# Altium PCB PCB1.PcbDoc
Units mm, origin at the board's own origin, x right, y up, seen from the top; angles counter-clockwise.
Board outline 152.4 x 101.6 mm, 4 copper layers (Top Layer, Int1 (GND), Int2 (PWR), Bottom Layer), stack 1.569 mm thick; 49 components, 40 nets, 216 pads, 0 vias.
Unrouted connection lines stored in the file: 131.
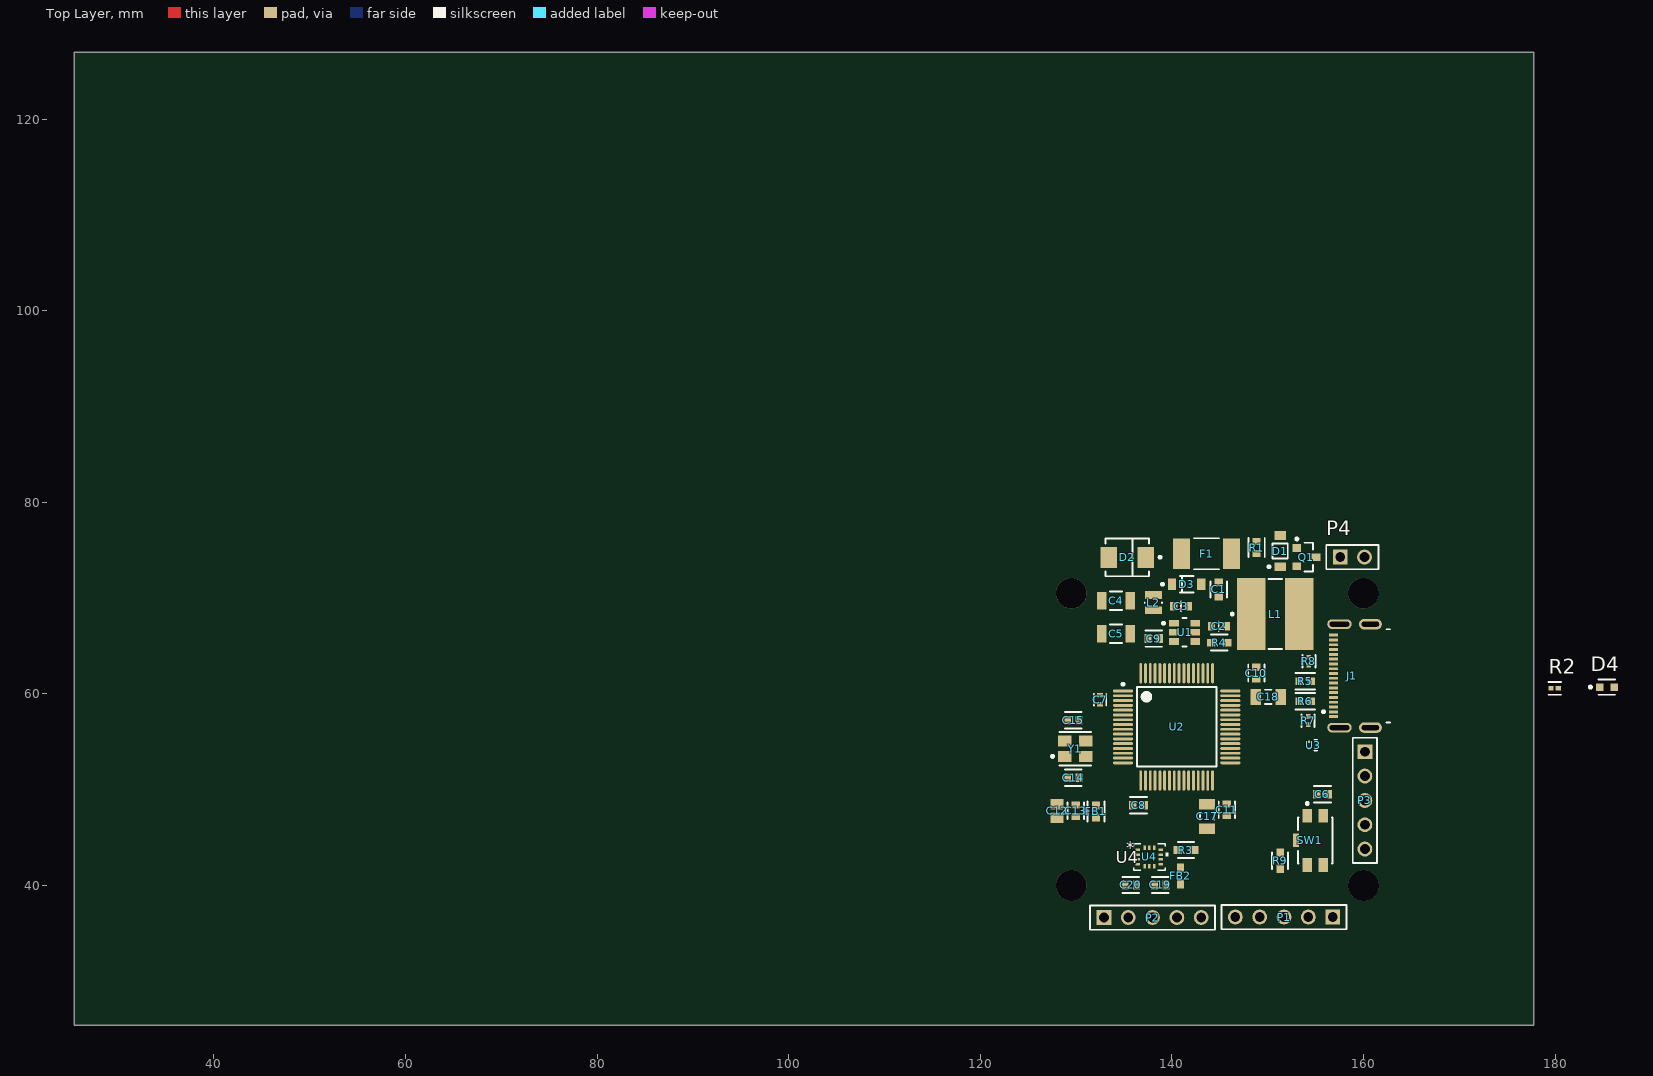
[diagram p0: Top Layer view]
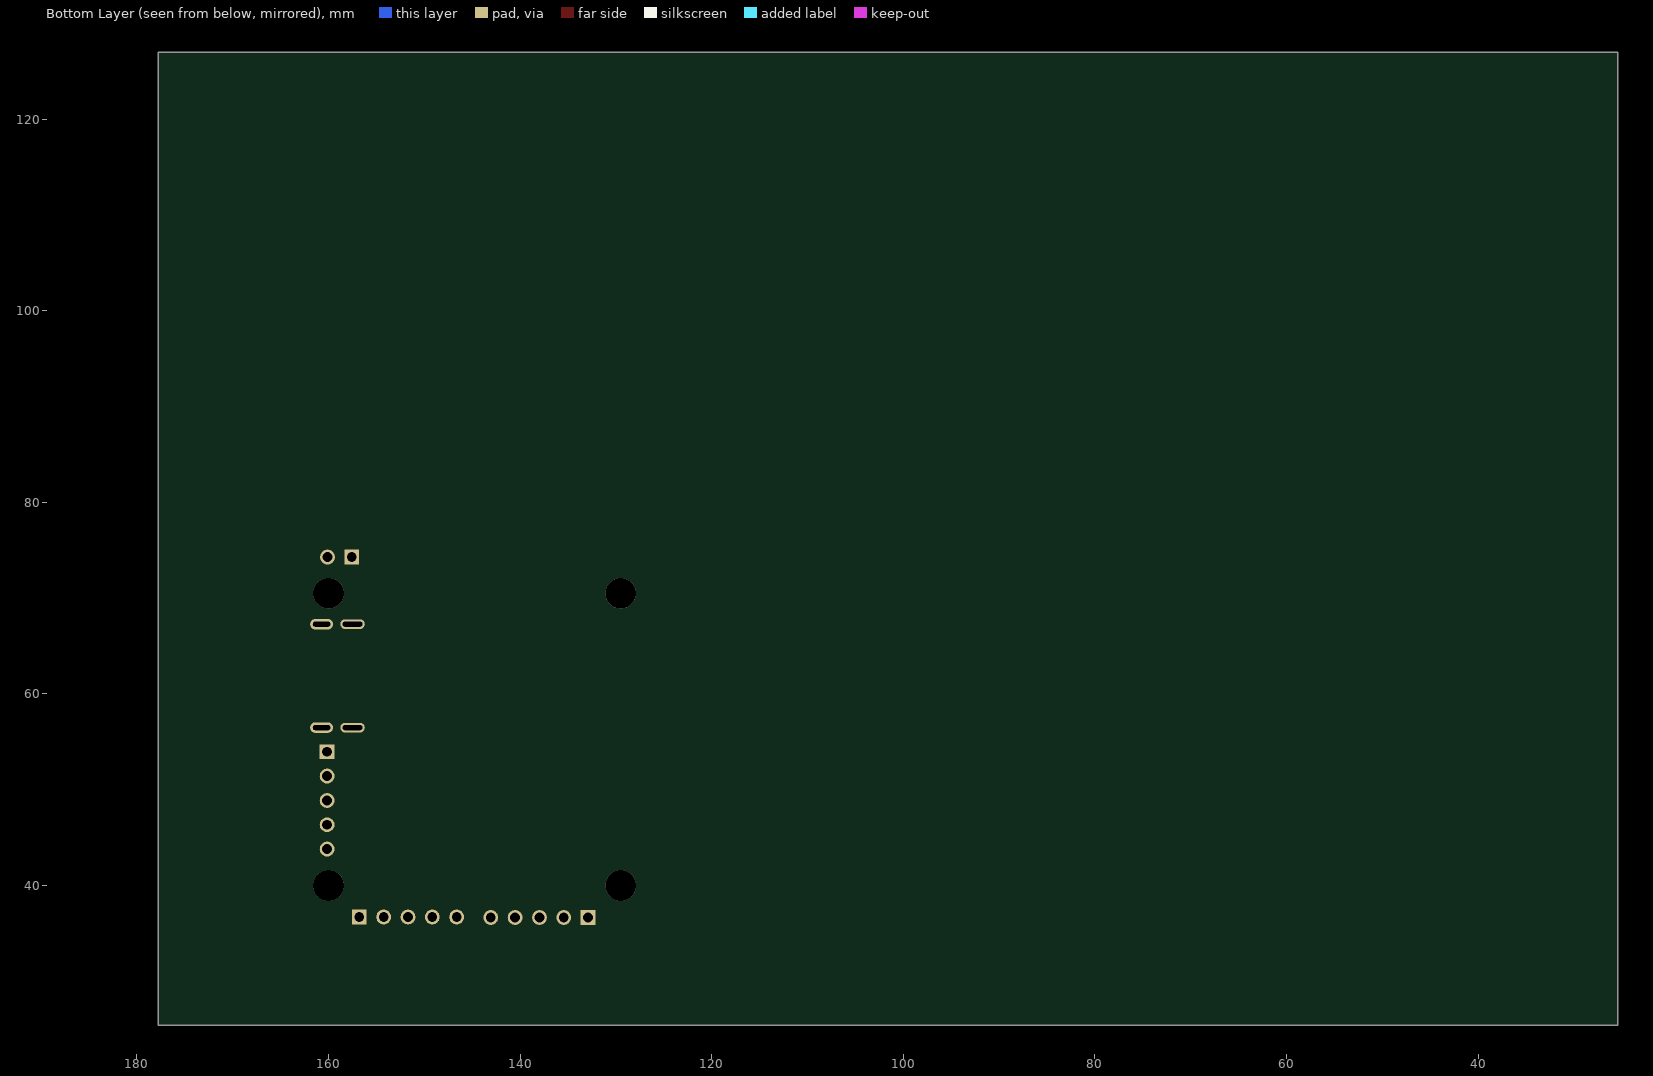
[diagram p1: Bottom Layer view, seen from below]
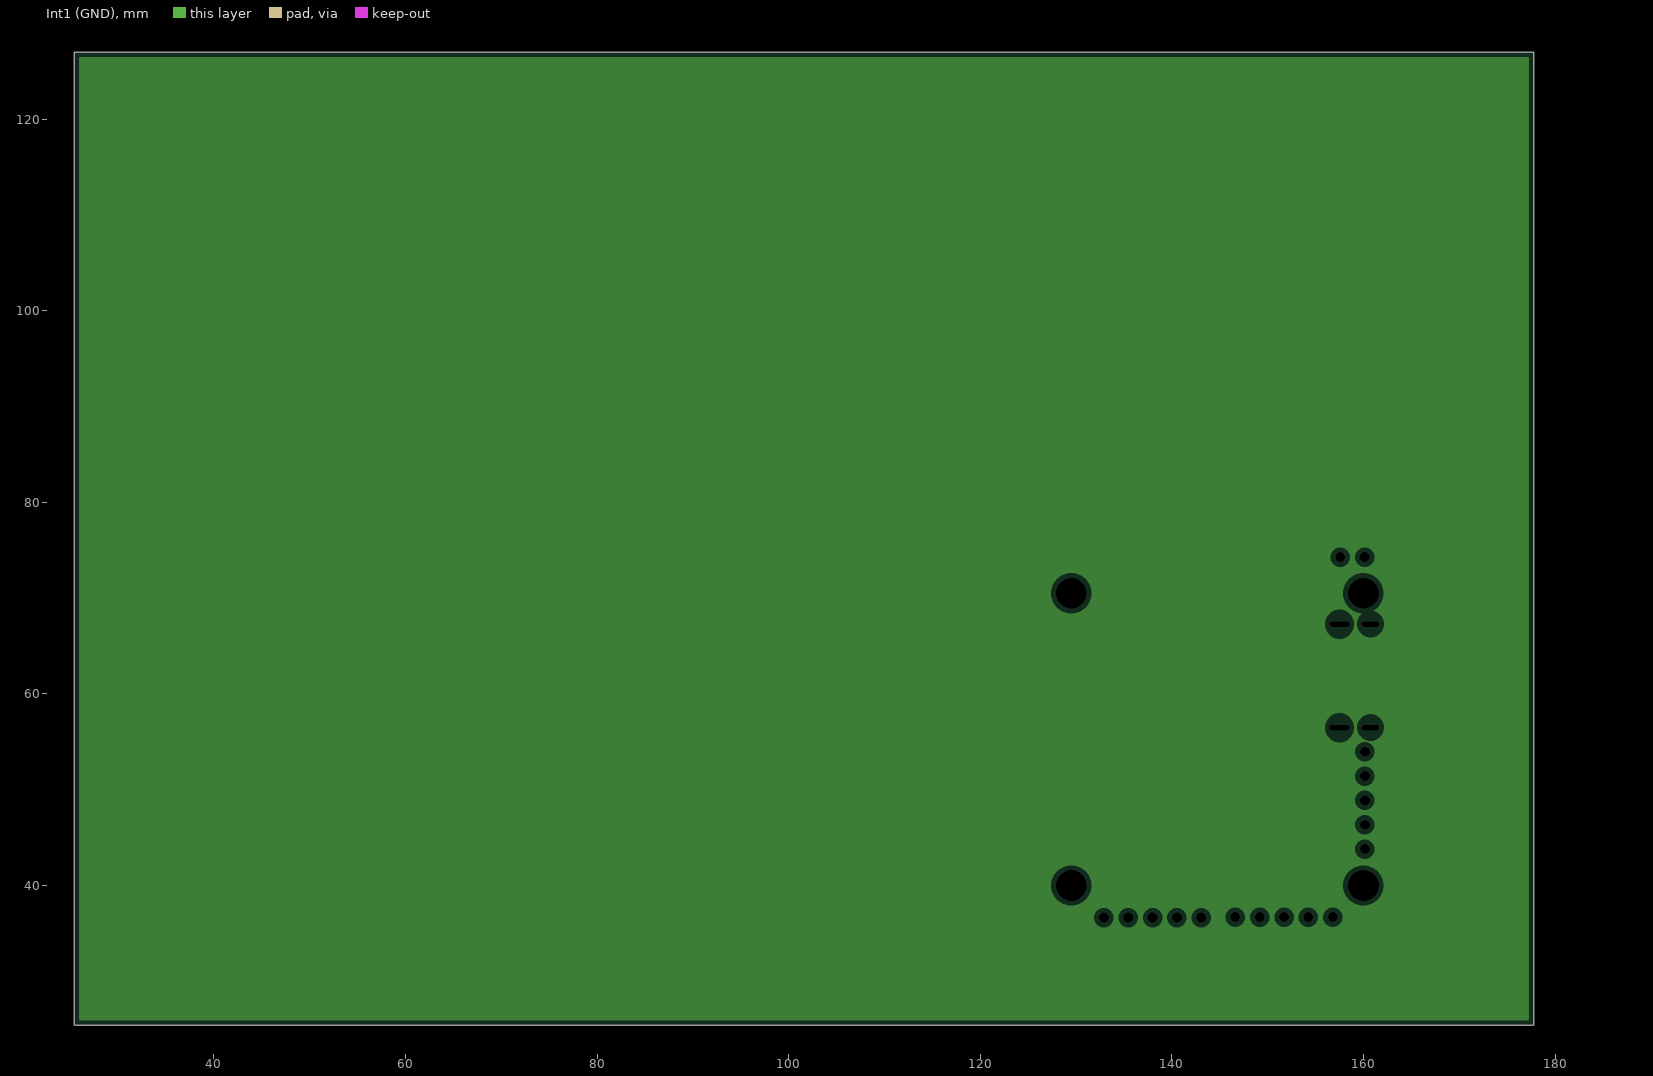
[diagram p2: Int1 (GND), clearances drawn from the general rule]
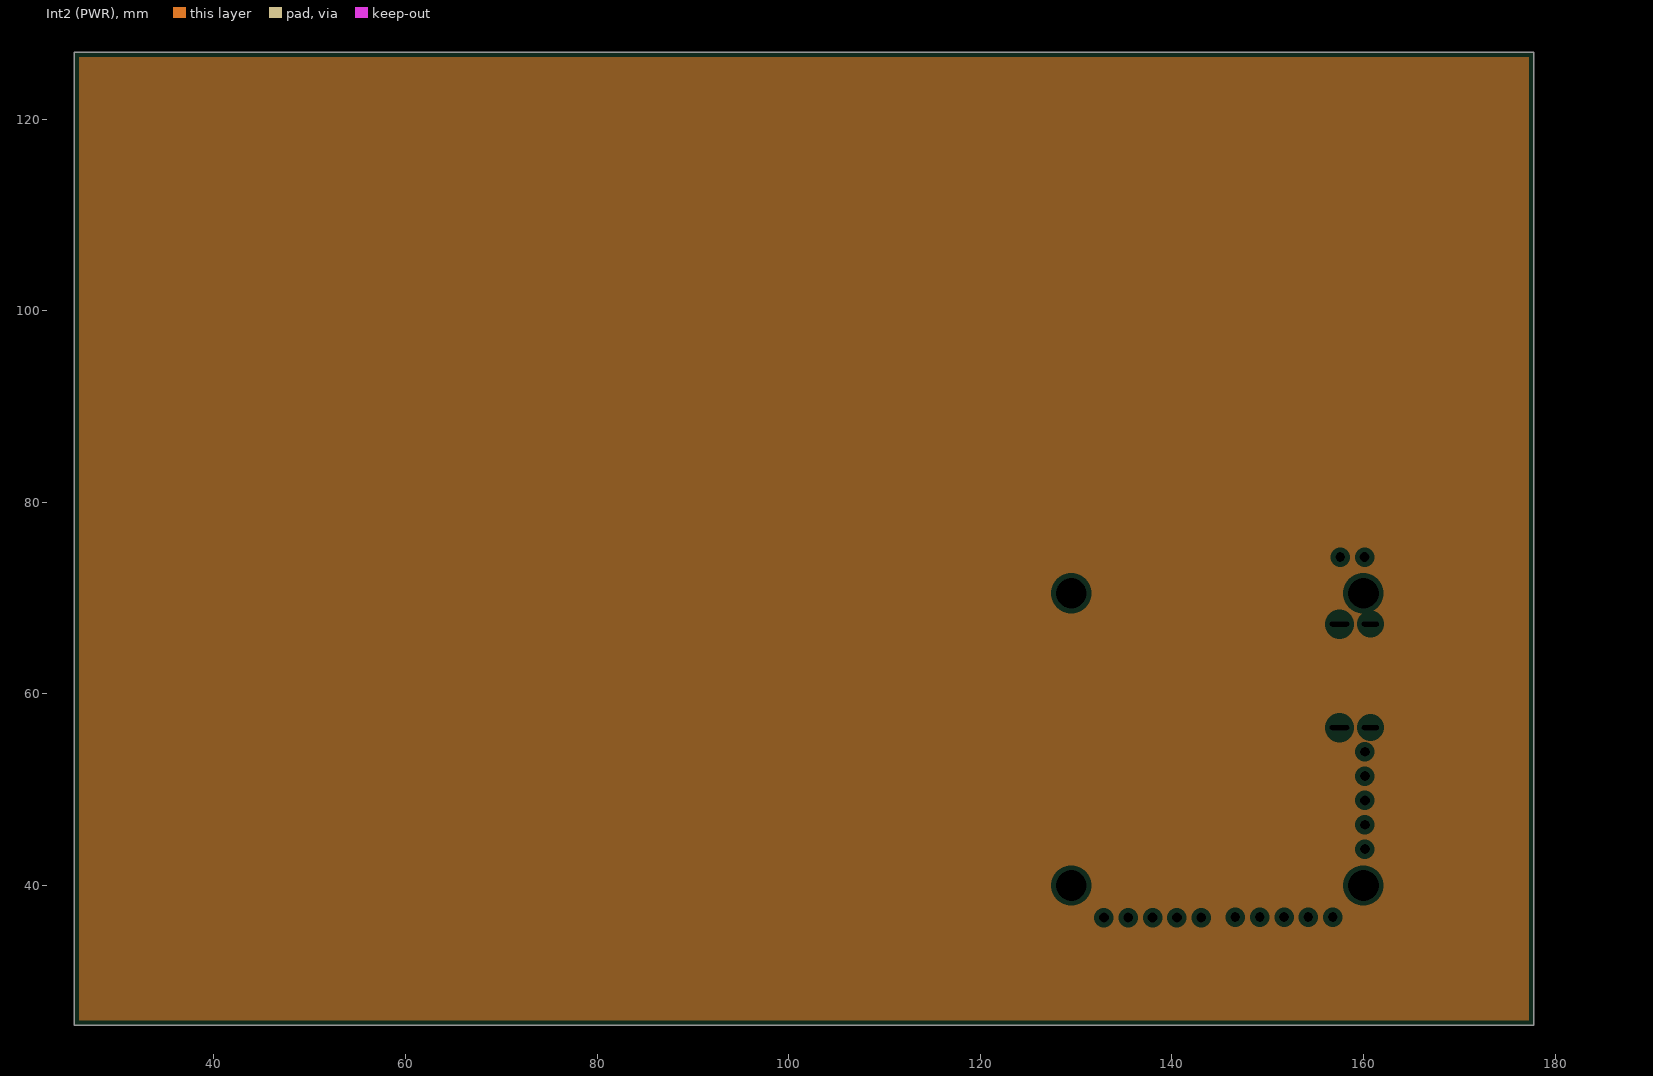
[diagram p3: Int2 (PWR), clearances drawn from the general rule]

## Layer stack, top to bottom
Top Solder: solder mask 0.0254, SM-001, Dk 4
Top Layer: signal copper 0.035
Dielectric 1: prepreg 0.0994, PP-017, Dk 4.1
Int1 (GND): plane copper 0.0175
Dielectric 3: core 1.265, Core-039, Dk 4.6
Int2 (PWR): plane copper 0.0175
Dielectric 5: prepreg 0.0994, PP-017, Dk 4.1
Bottom Layer: signal copper 0.035
Bottom Solder: solder mask 0.0254, SM-001, Dk 4

## Board outline
25.4,25.4 177.8,25.4 177.8,127 25.4,127

## Design rules (kind name [scope] priority, off if disabled: settings)
Clearance [All] p1: gap=0.254 ignorepadtopadclearanceinfootprint=TRUE
PlaneClearance [All] p1: clearance=0.508
PlaneConnect [All] p1: planeconnectstyle=Relief reliefexpansion=0.508 reliefentries=4 reliefconductorwidth=0.254 reliefairgap=0.254
PolygonConnect [All] p1: connectstyle=Relief reliefconductorwidth=0.254 reliefentries=4 polygonreliefangle="90 Angle" airgapwidth=0.254
RoutingVias [All] p1: holewidth=0.711 width=1.27 viastyle="Through Hole" minholewidth=0.711 minwidth=1.27 maxholewidth=0.711 maxwidth=1.27
SolderMaskExpansion [All] p1: expansion=0.102 istentingtop=FALSE
SupplyNets "Schematic Supply Nets_4" [InNet('3V3A')] p1: voltage=0.000
SupplyNets "Schematic Supply Nets_3" [InNet('3V3')] p2: voltage=0.000
SupplyNets "Schematic Supply Nets_2" [InNet('GND')] p3: voltage=0.000
SupplyNets "Schematic Supply Nets_1" [InNet('V_BAT')] p4: voltage=0.000
SupplyNets "Schematic Supply Nets" [InNet('USB_VBUS')] p5: voltage=0.000
Width [All] p1: maxlimit=0.5 minlimit=0.2 preferedwidth=0.254 toplayer_prefwidth=0.2 bottomlayer_minwidth=0.254 bottomlayer_maxwidth=0.254 minimp=50.000000 maximp=50.000000 favimp=50.000000
28 further rules are at their usual default settings.

## Classes and differential pairs
component class Power: C1 C2 C3 C4 C5 D1 D2 D3 D4 F1 L1 L2 P4 Q1 R1 R2 U1
component class MCU: C6 C7 C8 C9 C10 C11 C12 C13 C14 C15 C17 C18 FB1 R3 R4 R9 SW1 U2 Y1
component class Connectors: C19 C20 FB2 J1 P1 P2 P3 R5 R6 R7 R8 U3 U4

## Components (designator, comment, footprint, x,y, rotation, side; value= is the part's Value field where it differs from the comment)
C1 "CC0603MRX7R9BB104" FP-CC0603-DA-MFG 144.9,70.9 r270 top value="100 nF"
C2 "ZRB18AR61A226ME01K" FP-ZRB18A-0_2-MFG 144.9,67.075 r0 top
C3 "ZRB18AR61A226ME01K" FP-ZRB18A-0_2-MFG 140.975,69.15 r180 top
C4 "CC1206KKX5R9BB106" FP-CC1206-FD-MFG 134.175,69.725 r180 top
C5 "CC1206KKX5R9BB106" FP-CC1206-FD-MFG 134.175,66.275 r180 top
C6 "100n" FP-C0603C-CF-MFG 155.725,49.525 r180 top value="0.10 μF"
C7 "10u" FP-GRM155-0_2-MFG 132.5,59.375 r270 top
C8 "100n" FP-C0603C-CF-MFG 136.525,48.375 r180 top value="0.10 μF"
C9 "100n" FP-C0603C-CF-MFG 138.1,65.775 r0 top value="0.10 μF"
C10 "100n" FP-C0603C-CF-MFG 148.825,62.175 r90 top value="0.10 μF"
C11 "100n" FP-C0603C-CF-MFG 145.75,47.9 r270 top value="0.10 μF"
C12 "1u" CAPC2013X145X50LL20T25 128.025,47.775 r270 top
C13 "100n" FP-C0603C-CF-MFG 129.975,47.8 r270 top value="0.10 μF"
C14 "10p" FP-C0603C-CF-MFG 129.701,51.25 r0 top value="10 pF"
C15 "10p" FP-C0603C-CF-MFG 129.701,57.25 r180 top value="10 pF"
C17 "2.2u" CAPC3216X180X50LL20T25 143.675,47.2 r270 top
C18 "2.2u" CAPC3216X180X50LL20T25 150.05,59.675 r0 top
C19 "100n" FP-C0603C-CF-MFG 138.8,40.05 r180 top value="0.10 μF"
C20 "100n" FP-C0603C-CF-MFG 135.7,40.05 r0 top value="0.10 μF"
D1 "SZMMSZ4696T1G" ONSC-SOD-123-2-425-04_V 151.3,74.9 r90 top
D2 "SMBJ15A-E3/52" FP-95401-MFG 135.35,74.25 r180 top
D3 "RB168MM-40TR" FP-PMDU-MFG 141.55,71.45 r0 top
D4 "SML-LX0603SIW-TR" FP-SML-LX0603SIW-TR-MFG 185.42,60.706 r0 top
F1 "1812L075/24DR" LFUS-1812L07524DR_V 143.625,74.625 r180 top
FB1 "MPZ1608S101ATAH0" FP-MPZ1608-0_6-IPC_C 132.075,47.726 r270 top
FB2 "742863160" "WE-CBF HF_0603_HC" 140.9,41 r90 top
J1 "CX90M-16P" FP-CX90M-16P-MFG 159.9,61.875 r90 top
L1 "744787039" WE-PD2SR_7850 1420.8,1338.325 r0 top
L2 "LQM2MPN1R0MGHL" FP-LQM2MPN_GH-MFG 138.075,69.525 r90 top
P1 "TSW-105-05-F-S" SMTC-TSW-105-05-X-S 156.79,36.7 r180 top
P2 "TSW-105-05-F-S" SMTC-TSW-105-05-X-S 132.905,36.65 r0 top
P3 "TSW-105-05-F-S" SMTC-TSW-105-05-X-S 160.15,53.955 r270 top
P4 "TSW-102-26-T-S" SMTC-TSW-102-26-XX-S 157.575,74.275 r0 top
Q1 "DMP3098L-7" DIOD-SOT23-3_V 154.05,74.275 r0 top
R1 "CRGP0603F100K" FP-CRGP0603-IPC_C 148.85,75.275 r270 top value=100KΩ
R2 "1k" FP-CRGCQ0402-IPC_C 179.959,60.579 r0 top value=1KΩ
R3 "10K" FP-AC0603-MFG 141.475,43.7 r180 top
R4 "10k" FP-AC0603-MFG 144.95,65.35 r0 top
R5 "22R" FP-CRGCQ0603-IPC_C 153.925,61.325 r0 top value=22Ω
R6 "22R" FP-CRGCQ0603-IPC_C 153.925,59.239 r0 top value=22Ω
R7 "5.1k" FP-RN73R1E-IPC_C 154.225,57.214 r270 top
R8 "5.1k" FP-RN73R1E-IPC_C 154.3,63.414 r90 top
R9 "10kR" FP-AC0603-MFG 151.3,42.575 r90 top
SW1 "EVQ-P2F02K" FP-EVQ-P2F02K-MFG 154.975,44.7 r0 top
U1 "AP63203WU-7" FP-TSOT26-MFG 141.325,66.425 r0 top
U2 "STM32F405RGT6" STM-LQFP64_M 140.5,56.55 r0 top
U3 "TPD2EUSB30DRTR" DRT0003A 154.75,54.65 r0 top
U4 "BMI270" BMI270_BOS 137.65,42.975 r0 top
Y1 "16MHz" FP-ABM8W-MFG 129.901,54.275 r0 top

## Footprints (in the part's own frame and the unit in brackets; to place one, negate y for a bottom-side part, rotate by r counter-clockwise, add the part's x,y. Pads: shape width x height; smd on the part's side, far side on the other; paste and mask are expansions set on the pad)
BMI270_BOS [mil]
  rect 19x10 smd paste+0 mask+0: 1(-47.5,29.53) 2(-47.5,9.84) 3(-47.5,-9.84) 4(-47.5,-29.53) 8(47.5,-29.53) 9(47.5,-9.84) 10(47.5,9.84) 11(47.5,29.53)
  rect 10x19 smd paste+0 mask+0: 5(-19.68,-37.5) 6(0,-37.5) 7(19.69,-37.5) 12(19.69,37.5) 13(0,37.5) 14(-19.68,37.5)
  silkscreen extent -65,-55 77,55, body extent -60,-50 60,50, height 34
CAPC2013X145X50LL20T25 [mm] "Chip Capacitor, 2-Leads, Body 2.00x1.25mm, IPC High Density"
  rect 1.1x1.35 smd: 1(-0.7,0) 2(0.7,0)
  body extent -1.1,-0.72 1.1,0.72, height 1.45
CAPC3216X180X50LL20T25 [mm] "Chip Capacitor, 2-Leads, Body 3.20x1.60mm, IPC High Density"
  rect 1.1x1.7 smd: 1(-1.3,0) 2(1.3,0)
  silkscreen extent -0.35,-0.75 0.35,0.75, body extent -1.7,-0.9 1.7,0.9, height 1.8
DIOD-SOT23-3_V [mm] "SOT23, 3-Leads, Body 3x1.4mm, Pitch 0.95mm"
  rect 0.9x0.8 smd: 1(-1,0.95) 2(-1,-0.95) 3(1,0)
  silkscreen extent -1.12,-1.5 0.7,2.02, body extent -1.25,-1.5 1.25,1.5, height 1.1
DRT0003A [mm] "SOTFL, 3-Leads, Body 1x1mm (inc leads), Pitch 0.35mm"
  rrect33% 0.3x0.3 smd: 1(-0.425,0.35) 2(-0.425,-0.35) 3(0.425,0)
  silkscreen extent 0.13,-0.55 0.43,0.55, body extent -0.5,-0.5 0.5,0.5, height 0.5
FP-95401-MFG [mil]
  rect 67.5x86 smd paste+0 mask+0: 1(-76.25,0) 2(76.25,0)
  silkscreen extent -140,-78 90,78, body extent -114,-81 114,81, height 10
FP-ABM8W-MFG [mm]
  rect 1.4x1.15 smd paste+0 mask+0: 1(-1.1,-0.8) 2(1.1,-0.8) 3(1.1,0.8) 4(-1.1,0.8)
  silkscreen extent -2.47,-1.75 1.65,1.75, body extent -1.9,-1.48 1.9,1.48, height 0.25
FP-AC0603-MFG [mm]
  rect 0.9x0.8 smd paste+0 mask+0: 1(-0.85,0) 2(0.85,0)
  silkscreen extent -0.85,-0.82 0.85,0.82, body extent -1.4,-0.55 1.4,0.55, height 0.25
FP-C0603C-CF-MFG [mm]
  rect 0.75x0.9 smd paste+0 mask+0: 1(-0.6,0) 2(0.6,0)
  silkscreen extent -0.87,-0.85 0.88,0.85, body extent -1.2,-0.6 1.2,0.6, height 0.25
FP-CC0603-DA-MFG [mm]
  rect 0.8x0.9 smd paste+0 mask+0: 1(-0.75,0) 2(0.75,0)
  silkscreen extent -0.85,-0.85 0.85,0.85, body extent -1.35,-0.75 1.35,0.75, height 0.25
FP-CC1206-FD-MFG [mm]
  rect 1x1.8 smd paste+0 mask+0: 1(-1.5,0) 2(1.5,0)
  silkscreen extent -0.63,-0.95 0.63,0.95, body extent -2.32,-1.38 2.32,1.38, height 0.25
FP-CRGCQ0402-IPC_C [mm]
  rect 0.56x0.472 smd paste+0 mask+0: 1(-0.376,0) 2(0.376,0)
  silkscreen extent -0.66,-0.67 0.66,0.67, body extent -0.76,-0.38 0.76,0.38, height 0.25
FP-CRGCQ0603-IPC_C [mm]
  rect 0.758x0.812 smd paste+0 mask+0: 1(-0.627,0) 2(0.627,0)
  silkscreen extent -1.01,-0.85 1.01,0.85, body extent -1.11,-0.55 1.11,0.55, height 0.25
FP-CRGP0603-IPC_C [mm]
  rect 0.758x0.812 smd paste+0 mask+0: 1(-0.627,0) 2(0.627,0)
  silkscreen extent -1.01,-0.85 1.01,0.85, body extent -1.11,-0.55 1.11,0.55, height 0.25
FP-CX90M-16P-MFG [mm]
  rect 0.3x0.9 smd paste+0 mask+0: 1(-4.25,3.025) 2(4.25,3.025) A1(-3.75,3.025) A4(-2.75,3.025) A5(-1.75,3.025) A6(-0.75,3.025) A7(0.75,3.025) A8(1.75,3.025) A9(2.75,3.025) A12(3.75,3.025) B1(3.25,3.025) B4(2.25,3.025) B5(1.25,3.025) B6(0.25,3.025) B7(-0.25,3.025) B8(-1.25,3.025) B9(-2.25,3.025) B12(-3.25,3.025)
  rrect100% 1x2.55 hole 2.05 slot 0.5 at 0 deg paste-2539.97 mask+0: 3(-5.4,2.405) 4(5.4,2.405)
  rrect100% 1.1x2.4 hole 1.8 slot 0.5 at 0 deg paste-2539.97 mask+0: 5(-5.4,-0.825) 6(5.4,-0.825)
  silkscreen extent -4.87,-2.9 4.87,4.2, body extent -6.05,-3.37 6.05,3.78, height 0.25
FP-EVQ-P2F02K-MFG [mm]
  rect 1x1.45 smd paste+0 mask+0: 1(-0.85,2.575) 2(0.85,2.575) 3(-0.85,-2.575) 4(0.85,-2.575)
  rect 0.65x1.4 smd paste+0 mask+0: 5(-2.025,0)
  silkscreen extent -1.8,-2.4 1.8,3.97, body extent -2.45,-3.4 1.9,3.4, height 0.25
FP-GRM155-0_2-MFG [mm]
  rect 0.45x0.6 smd paste+0 mask+0: 1(-0.475,0) 2(0.475,0)
  silkscreen extent -0.6,-0.64 0.6,0.65, body extent -0.8,-0.45 0.8,0.45, height 0.25
FP-LQM2MPN_GH-MFG [mm]
  rect 0.8x1.8 smd paste+0 mask+0: 1(-0.8,0) 2(0.8,0)
  silkscreen extent -0.03,-0.9 0.03,0.9, body extent -1.3,-1 1.3,1, height 0.25
FP-MPZ1608-0_6-IPC_C [mm]
  rect 0.806x0.858 smd paste+0 mask+0: 1(-0.626,0) 2(0.626,0)
  silkscreen extent -1.03,-0.87 1.03,0.87, body extent -1.13,-0.58 1.13,0.58, height 0.25
FP-PMDU-MFG [mm]
  rect 0.85x1.2 smd paste+0 mask+0: 1(-1.525,0) 2(1.525,0)
  silkscreen extent -2.65,-0.85 0.72,0.85, body extent -2.05,-0.95 2.05,0.95, height 0.25
FP-RN73R1E-IPC_C [mm]
  rect 0.488x0.472 smd paste+0 mask+0: 1(-0.414,0) 2(0.414,0)
  silkscreen extent -0.66,-0.67 0.66,0.67, body extent -0.76,-0.38 0.76,0.38, height 0.25
FP-SML-LX0603SIW-TR-MFG [mm]
  rect 0.8x0.8 smd paste+0 mask+0: 1(-0.75,0) 2(0.75,0)
  silkscreen extent -1.85,-0.8 0.86,0.8, body extent -1.25,-0.56 1.25,0.56, height 0.25
FP-TSOT26-MFG [mm]
  rect 1x0.7 smd paste+0 mask+0: 1(-1.099,0.95) 2(-1.099,0) 3(-1.099,-0.95) 4(1.099,-0.95) 5(1.099,0) 6(1.099,0.95)
  silkscreen extent -2.32,-1.5 0.22,1.5, body extent -1.7,-1.6 1.7,1.6, height 0.25
FP-ZRB18A-0_2-MFG [mm]
  rect 0.75x0.9 smd paste+0 mask+0: 1(-0.775,0) 2(0.775,0)
  silkscreen extent 0,-0.5 0,0.5, body extent -1.25,-0.6 1.25,0.6, height 0.25
LFUS-1812L07524DR_V [mm] "SMD, 2-Leads, Body 4.55x3.24mm"
  rect 1.78x3.15 smd: 1(-2.615,0) 2(2.615,0)
  silkscreen extent -1.33,-1.62 1.33,1.62, body extent -2.27,-1.62 2.27,1.62, height 1.55
ONSC-SOD-123-2-425-04_V [mm] "SOD, 2-Leads, Body 2.69x1.6mm"
  rect 0.91x1.22 smd: 1(-1.635,0) 2(1.635,0)
  silkscreen extent -1.76,-0.8 0.78,1.28, body extent -1.35,-0.8 1.35,0.8, height 1.35
SMTC-TSW-102-26-XX-S [mm] ".025 SQ Post Terminal Strip Assembly, 1x2 Pins, Vertical, 2.54mm Pitch, Male"
  rect 1.55x1.55 hole 1.02: 1(0,0)
  round 1.55 hole 1.02: 2(2.54,0)
  silkscreen extent -1.46,-1.27 4,1.27, body extent -1.4,-1.27 3.81,1.27, height 8.38
SMTC-TSW-105-05-X-S [mm] ".025 SQ Post Terminal Strip Assembly, 1x5 Pins, Vertical, 2.54mm Pitch, Male"
  rect 1.55x1.55 hole 1.02: 1(0,0)
  round 1.55 hole 1.02: 2(2.54,0) 3(5.08,0) 4(7.62,0) 5(10.16,0)
  silkscreen extent -1.46,-1.27 11.62,1.27, body extent -1.27,-1.27 11.43,1.27, height 5.21
STM-LQFP64_M [mm] "Thin QFP, 64-Leads, Body 10x10mm, Pitch 0.5mm, IPC Low Density"
  oval 2.1x0.3 smd: 1(-5.6,3.75) 2(-5.6,3.25) 3(-5.6,2.75) 4(-5.6,2.25) 5(-5.6,1.75) 6(-5.6,1.25) 7(-5.6,0.75) 8(-5.6,0.25) 9(-5.6,-0.25) 10(-5.6,-0.75) 11(-5.6,-1.25) 12(-5.6,-1.75) 13(-5.6,-2.25) 14(-5.6,-2.75) 15(-5.6,-3.25) 16(-5.6,-3.75) 33(5.6,-3.75) 34(5.6,-3.25) 35(5.6,-2.75) 36(5.6,-2.25) 37(5.6,-1.75) 38(5.6,-1.25) 39(5.6,-0.75) 40(5.6,-0.25) 41(5.6,0.25) 42(5.6,0.75) 43(5.6,1.25) 44(5.6,1.75) 45(5.6,2.25) 46(5.6,2.75) 47(5.6,3.25) 48(5.6,3.75)
  oval 0.3x2.1 smd: 17(-3.75,-5.6) 18(-3.25,-5.6) 19(-2.75,-5.6) 20(-2.25,-5.6) 21(-1.75,-5.6) 22(-1.25,-5.6) 23(-0.75,-5.6) 24(-0.25,-5.6) 25(0.25,-5.6) 26(0.75,-5.6) 27(1.25,-5.6) 28(1.75,-5.6) 29(2.25,-5.6) 30(2.75,-5.6) 31(3.25,-5.6) 32(3.75,-5.6) 49(3.75,5.6) 50(3.25,5.6) 51(2.75,5.6) 52(2.25,5.6) 53(1.75,5.6) 54(1.25,5.6) 55(0.75,5.6) 56(0.25,5.6) 57(-0.25,5.6) 58(-0.75,5.6) 59(-1.25,5.6) 60(-1.75,5.6) 61(-2.25,5.6) 62(-2.75,5.6) 63(-3.25,5.6) 64(-3.75,5.6)
  silkscreen extent -5.72,-4.15 4.15,4.57, body extent -5,-5 5,5, height 1.6
"WE-CBF HF_0603_HC" [mm] "SMD EMI Suppression Ferrite  Bead, body 1.60x0.80mm"
  rect 0.95x0.7 smd: 1(-0.825,0) 2(0.825,0)
  body extent -0.8,-0.4 0.8,0.4, height 0.8
WE-PD2SR_7850 [mm] "SMD Shielded Power Inductor, body 7.8x7.0mm"
  rect 3x7.5 smd: 1(-1272.5,-1270) 2(-1267.5,-1270)
  silkscreen extent -1274.62,-1273.65 -1269.3,-1266.35, body extent -1273.9,-1273.5 -1266.1,-1266.5, height 5

## Part data
C1: library part CMP-03422-000537-1, "CAP CER 0.1UF 50V X7R 0603", Capacitance="100 nF", Manufacturer=YAGEO, Package=CC0603-DA, Temperature="-55°C to +125°C", Temperature Characteristic=X7R, Temperature Coefficient=15%, Temperature Range High=+125°C, Temperature Range Low=-55°C, Tolerance=0.2, Voltage="50 V", Automotive=No, Category=Cap, ComponentLink2Description=Datasheet, ComponentLink2URL=http://www.yageo.com/documents/recent/UPY-GPHC_X7R_6.3V-to-50V_18.pdf, Device Class L1="Passive Components", Device Class L2=Capacitors, Device Class L3="Ceramic Capacitors", Digikey Description="CAP CER 0.1UF 50V X7R 0603", Footprint Url=http://www.yageo.com/exep/pages/download/literatures/UPY-C_GEN_24.pdf, Height=0.9mm, Lead Free=Yes, Manufacturer Part Number=CC0603MRX7R9BB104, Material=Ceramic, Mouser Description="Cap Ceramic 50V 20% +Tol 20% -Tol X7R 15% TC 0.1uF SMD 0603", Octopart=https://octopart.com/cc0603mrx7r9bb104-yageo-67308423, RoHS=TRUE, Voltage Rating="50 V"
C2 C3: library part CMP-06035-026751-1, "CAP CER MLCC"
C4 C5: library part CMP-03422-001420-1, "CAP CER 10UF 50V X5R 1206", Capacitance=10uF, Case/Package=1206, Dielectric=X5R, Max Operating Temperature=85°C, Min Operating Temperature=-55°C, Tolerance=10%, Voltage Rating=50V, Halogen Free="Halogen Free", Lead Free="Lead Free", Length=0.126inch, Mount="Surface Mount", Packaging="Tape and Reel", RoHS Compliant=Yes, Thickness=0.075inch, Voltage Rating (DC)=50V, Width=0.063inch
C6 C8 C9 C10 C11 C13 C19 C20: library part CMP-2006-03066-2, "CAP CER 0.1UF 25V Y5V 0603", Capacitance="0.10 μF", Manufacturer=KEMET, Manufacturer Part Number=C0603C104M3VACTU, Package=C0603C-CF, Temperature="-55°C to +125°C", Temperature Characteristic=Y5V, Temperature Coefficient=30ppm/°C, Temperature Range High=+125°C, Temperature Range Low=-55°C, Tolerance=0.2, Voltage Rating="25 V", Automotive=Yes, Automotive Grade="Grade 1", Category=Cap, ComponentLink2Description=Datasheet, ComponentLink2URL=https://api.kemet.com/component-edge/download/datasheet/C0603C100J5GACAUTO.pdf, Device Class L1="Passive Components", Device Class L2=Capacitors, Device Class L3="Ceramic Capacitors", Digikey Description="CAP CER 0.1UF 25V Y5V 0603", Height=0.87mm, Lead Free=Yes, Material=Ceramic, Mouser Description="Multilayer Ceramic Capacitors MLCC - SMD/SMT 25volts 0.1uF Y5V 20%", Octopart=https://octopart.com/c0603c104m3vactu-kemet-149363, RoHS=TRUE
C7: library part CMP-00260-135863761-1, "GRM155D70G106ME18D SMD Chip Multilayer Ceramic Capacitor", Capacitance=10µF, Case/Package=0402, Dielectric=X7T, Voltage Rating (DC)=4V, Length=1mm, Lifecycle Status=Production, NexarPartId=135863761, Thickness=500µm, Width=500µm
C12: library part CMP-1036-04746-2, Manufacturer=Kemet, Part Number=C0805C105K4PACTU
C14 C15: library part CMP-03020-033857-1, "CAP CER 10PF 100V C0G/NP0 0603", Capacitance="10 pF", Manufacturer=KEMET, Manufacturer Part Number=C0603C100J1GACAUTO, Package=C0603C-CF, Temperature="-55°C to +125°C", Temperature Characteristic=C0G, Temperature Coefficient=30ppm/°C, Temperature Range High=+125°C, Temperature Range Low=-55°C, Tolerance=0.05, Voltage Rating="100 V", Automotive=Yes, Automotive Grade="Grade 1", Category=Cap, ComponentLink2Description=Datasheet, ComponentLink2URL=https://api.kemet.com/component-edge/download/datasheet/C0603C100J5GACAUTO.pdf, Device Class L1="Passive Components", Device Class L2=Capacitors, Device Class L3="Ceramic Capacitors", Digikey Description="CAP CER 10PF 100V C0G/NP0 0603", Height=0.87mm, Lead Free=Yes, Material=Ceramic, Mouser Description="Cap Ceramic 10pF 100V C0G 5% Pad SMD 0603 125C Automotive T/R", Octopart=https://octopart.com/c0603c100j1gacauto-kemet-31033705, RoHS=TRUE
C17 C18: library part CMP-1037-04812-2, "Chip Capacitor, 2.2 uF, +/- 10%, 16 V, -55 to 125 degC, 1206 (3216 Metric), RoHS, Tape and Reel", Capacitance=2.2uF, Capacitance - nF=2200nF, Case Code - in=1206, Case Code - mm=3216, Case Height=1mm, Case Length=3.2mm, Case Width=1.6mm, Dielectric=X7R, Manufacturer=Kemet, Maximum Operating Temperature=+125C, Minimum Operating Temperature=-55C, Operating Temperature Range=-55Cto+125C, Package / Case=1206(3216metric), Package Description="2-Pin Surface Mount Device, Body 3.2 x 1.6 mm", Temperature Coefficient / Code=+/-15%, Tolerance=10%, Voltage Rating=16V, Brand=Kemet, Class=Class1, Datasheet URL=http://www.kemet.com/docfinder?Partnumber=C1206C106K8RACTU, Datasheet Version=02/2016, Dimensions=1.6mmWx3.2mmLx1mmH, Dissipation Factor DF=5, Factory Pack Quantity=2000, Manufacturer URL=http://www.kemet.com/, Mounting Technology=SurfaceMount, Package Reference=1206, Packaging=Reel, Product=GeneralTypeMLCCs, Product Category=MultilayerCeramicCapacitorsMLCC-SMD/SMT, RoHS=Details, Series=C1206C, Termination Style=SMD/SMT, Type=SMDMLCCX7R6.3-250VDCCommericalGrade, Voltage Rating DC=16V
D1: library part CMP-1060-00433-1, "Zener Voltage Regulator, 500 mW, 2-Pin SOD-123, Pb-Free, Tape and Reel", Manufacturer="On Semiconductor", ComponentLink1Description="Manufacturer URL", ComponentLink1URL=http://www.onsemi.com/, ComponentLink2Description=Datasheet, ComponentLink2URL=http://www.onsemi.com/pub_link/Collateral/MMSZ4678T1-D.PDF, ComponentLink3Description="Package Specification", ComponentLink3URL=http://www.onsemi.com/pub_link/Collateral/425-04.PDF, DatasheetVersion="Rev. 9", Mounting Technology="Surface Mount", P Max (W)=0.5, PackageDescription="2-Pin SOD, Body 1.6 x 2.69 mm", PackageReference=SOD-123-2-425-04, PackageVersion="Rev. G, 10/2009", Packing="Tape and Reel", PartNumber=SZMMSZ4696T1G, RoHS=Pb-Free, VZ Typ (V)=9.1
D2: library part CMP-02577-000009-1, "TVS DIODE 15V 24.4V DO214AA", Breakdown Voltage=16.7V, Clamping Voltage=24.4V, Manufacturer=Vishay, Max Junction Temp=+150°C, Package=95401, Peak Pulse Current=24.6A, Peak Pulse Power=600W, Reverse Standoff Voltage=15V, Temperature="-55°C to +150°C", Temperature Range Low=-55°C, Automotive=No, Category=Diode, ComponentLink2Description=Datasheet, ComponentLink2URL=https://www.vishay.com/docs/88392/smbj.pdf, Device Class L1="Circuit Protection", Device Class L2="TVS Diodes", Device Class L3=unset, Digikey Description="TVS DIODE 15V 24.4V DO214AA", Direction=Unidirectional, Footprint Url=https://www.vishay.com/docs/95401/smb.pdf, Height=2.44mm, Lead Free=Yes, Manufacturer Part Number=SMBJ15A-E3/52, Mouser Description="TVS Diodes - Transient Voltage Suppressors 600W 15V 5% Uni", Number Of Channels=1, Octopart=https://octopart.com/smbj15a-e3%2F52-vishay-39558613, RoHS=TRUE, Standoff Height=0mm, Temperature Range High=+150°C
D3: library part CMP-08971-000002-1, "DIODE SCHOTTKY 40V 1A PMDU", Forward Current=1A, Manufacturer=Rohm, Max Junction Temp=+150°C, Max Repetitive Reverse Voltage=40V, Max Surge Forward Current=40A, Package=PMDU, Peak Reverse Current=0.05uA, Temperature="to +150°C", Automotive=No, Category=Diode, ComponentLink2Description=Datasheet, ComponentLink2URL=https://www.rohm.com/datasheet/RB168MM-40/rb168mm-40tr-e, Device Class L1="Discrete Semiconductors", Device Class L2=Diodes, Device Class L3="Schottky Diodes", Digikey Description="DIODE SCHOTTKY 40V 1A PMDU", Height=0.9mm, Lead Free=Yes, Manufacturer Part Number=RB168MM-40TR, Mouser Description="Schottky Diodes & Rectifiers 40V-VR 1A-IO 30A-IFSM", Octopart=https://octopart.com/rb168mm-40tr-rohm-65063949, Reverse Voltage=40V, RoHS=TRUE, Temperature Range High=+150°C
D4: library part CMP-57192-000009-1, "LED RED DIFFUSED SMD", Case Code (Imperial)=0603, Case Code (Metric)=1608, Color=Red, Forward Current=20mA, Forward Voltage=2V, Lens Color=White, Max Operating Temperature=85°C, Min Operating Temperature=-25°C, Package Quantity=1, Power Rating=50mW, Approvals=UL, Case/Package=0603, Dominant Wavelength=636nm, Height=0.6mm, Illumination Color=Red, Lead Free="Lead Free", Length=1.6mm, Lens Style=Diffused, Lens Transparency=Diffused, Luminous Intensity=60mcd, Moisture Sensitivity Level=2, Mount="Surface Mount", Number of LEDs=1, Number of Pins=2, Packaging="Tape and Reel", REACH SVHC="No SVHC", RoHS Compliant=Yes, Test Current=20mA, Viewing Angle=140°, Wavelength=636nm, Width=0.8mm
F1: library part CMP-2000-05510-1, "Poly-Fuse(R) Resettable PTC, 24 V, 100 A, -40 to 85 degC, 2-Pin SMD, RoHS, Tape and Reel", Current Rating=100A, Hold Current=0.75A, Manufacturer=Littelfuse, Maximum Voltage=24VDC, Maximum Voltage DC=24V, Operating Temperature Range=-40Cto+85C, Package / Case=1812(4532metric), Package Description="2-Pin Surface Mount Device, Body 4.55 x 3.24 mm", Package Reference=1812L07524DR, Resistance=290mOhms, Trip Current=1.5A, Brand=Littelfuse, Current Rating (Max)=100A, Current Rating - Max=100A, Datasheet URL=http://www.littelfuse.com/~/media/electronics/datasheets/resettable_ptcs/littelfuse_ptc_1812l_datasheet.pdf.pdf, Datasheet Version=02/2016, Dimensions=4.37mmLx3.07mmWx0.75mmH, Factory Pack Quantity=1500, Manufacturer URL=http://www.littelfuse.com/, Mounting Style=SMD/SMT, Mounting Technology=SurfaceMount, Packaging=Reel, Product Category=ResettableFuses-PPTC, RoHS=Details, Series=1812L, Termination Style=SMD/SMT, Type=PolyFuseResettablePTC
FB1: library part CMP-08257-000005-2, "FERRITE BEAD 100 OHM 0603 1LN", Case Code (Imperial)=0603, Case Code (Metric)=1608, Current Rating=3A, DC Resistance (DCR)=30mR, Package Quantity=4000, Tolerance=25%, Case/Package=0603, Core Material=Ferrite, Depth=0.8mm, Height=0.03inch, Impedance=100R, Length=0.063inch, Max DC Current=3A, Mount="Surface Mount", Packaging="Tape and Reel", REACH SVHC="No SVHC", RoHS Compliant=Yes, Width=0.031inch
FB2: library part CMP-0220-00101-3, "Ferrite Bead (emi Suppression), 1.6X0.8X0.8MM (0603), 600O Impedance At 100 Mhz", Case Code (Imperial)=0603, Case Code (Metric)=1608, Case/Package=SMD/SMT, Current Rating=400mA, DC Resistance (DCR)=220mΩ, Max Current Rating=500mA, Max Operating Temperature=125°C, Min Operating Temperature=-55°C, Resistance=350mΩ, Test Frequency=100MHz, Tolerance=25%, Core Material=Ferrite, Depth=800µm, Height=800µm, Impedance=600Ω, Lead Free="Lead Free", Length=1.6mm, Max DC Current=500mA, Mount="Surface Mount", Number of Lines=1, Number of Pins=2, REACH SVHC=Unknown, RoHS=Compliant, Termination=SMD/SMT, Width=800µm
J1: library part CMP-11601-000005-1, "CONN RCPT USB2.0 TYPEC 16POS SMD", Current Rating=1.25A, Flammability Rating="UL94 V-0", Insulation Color=Black, Max Operating Temperature=85°C, Min Operating Temperature=-30°C, Connector Type=USB, Contact Plating=Gold, Gender=Receptacle, Mating Cycles=10000, Mount="Surface Mount", Number of Contacts=16, Number of Ports=1, Packaging="Cut Tape", Shielding=Shielded, Termination=Solder
L1: library part CMP-1397-00011-3, "Fixed Ind 3.9UH 3.8A 20 Mohm SMD", Ambient Temperature Range High=85°C, Ambient Temperature Range Low=-40°C, Case/Package=SMD/SMT, Current Rating=3.8A, DC Resistance (DCR)=16.7mΩ, Inductance=3.9µH, Inductance Tolerance=30%, Max Operating Temperature=125°C, Saturation Current=4A, Self Resonant Frequency=45MHz, Test Frequency=100kHz, Composition=Wirewound, Core Material="Composite, Ferrite", Depth=7mm, Height=4.8mm, Height - Seated (Max)=4.4958mm, Length=7.8mm, Max DC Current=3.8A, Min Operating Temperature=-40°C, Mount="Surface Mount", Number of Pins=2, REACH SVHC=Unknown, RMS Current (Irms)=3.8A, RoHS=Compliant, Series Resistance=16.7mΩ, Shielding=Shielded, Termination=SMD/SMT, Tolerance=30%, Width=7mm
L2: library part CMP-06042-016377-1, "FIXED IND 1UH 1.9A 80 MOHM SMD", Case Code (Imperial)=0806, Case Code (Metric)=2016, Current Rating=1.9A, DC Resistance (DCR)=80mR, Inductance=1uH, Max Operating Temperature=85°C, Min Operating Temperature=-40°C, Package Quantity=3000, Saturation Current=2A, Self Resonant Frequency=60MHz, Test Frequency=1MHz, Tolerance=20%, Case/Package=0806, Core Material=Ferrite, Height=0.9mm, Height - Seated (Max)=0.039inch, Lead Free="Contains Lead", Length=0.079inch, Max DC Current=1.9A, Mount="Surface Mount", Packaging="Tape and Reel", RoHS Compliant=Yes, Shielding=Shielded, Termination=SMD/SMT, Width=1.6mm
P1 P2 P3: library part CMP-1024-00365-1, "0.025\" SQ Post Header, Through-hole, Vertical, -55 to 125 degC, 2.54 mm Pitch, 5-Pin, Male, RoHS", Manufacturer=Samtec, Temperature Range="-55 to 125 degC", ComponentLink1Description="Manufacturer URL", ComponentLink1URL=http://www.samtec.com, ComponentLink2Description=Datasheet, ComponentLink2URL=http://www.samtec.com/documents/webfiles/pdf/TSW_TH.PDF, ComponentLink3Description="Package Specification", ComponentLink3URL=http://www.samtec.com/documents/webfiles/cpdf/TSW-XXX-XX-XXX-X-XX-XXX-MKT.pdf, DatasheetVersion=F-214, Mounting Technology=Through-hole, Orientation=Vertical, PackageDescription=".025[0.64] SQ. Post Terminal Strip Assembly", PackageReference=TSW-105-05-X-S, PackageVersion="DM, 8/1988", PartNumber=TSW-105-05-F-S, Pitch="2.54 mm", RoHS=True
P4: library part CMP-1024-00328-1, "0.025\" SQ Post Header, Through-hole, Vertical, -55 to 105 degC, 2.54 mm Pitch, 2-Pin, Male, RoHS", Manufacturer=Samtec, Temperature Range="-55 to 105 degC", ComponentLink1Description="Manufacturer URL", ComponentLink1URL=http://www.samtec.com, ComponentLink2Description=Datasheet, ComponentLink2URL=http://www.samtec.com/documents/webfiles/pdf/TSW_TH.PDF, ComponentLink3Description="Package Specification", ComponentLink3URL=http://www.samtec.com/documents/webfiles/cpdf/TSW-XXX-XX-XXX-X-XX-XXX-MKT.pdf, DatasheetVersion=F-214, Mounting Technology=Through-hole, Orientation=Vertical, PackageDescription=".025[0.64] SQ. Post Terminal Strip Assembly", PackageReference=TSW-102-26-XX-S, PackageVersion="DM, 8/1988", PartNumber=TSW-102-26-T-S, Pitch="2.54 mm", RoHS=True
Q1: library part CMP-0697-00001-2, "P-Channel Enhancement Mode MOSFET, -30 V VDS, -55 to 155 degC, 3-Pin SOT23, RoHS, Tape and Reel", Manufacturer="Diodes Inc", Operating Temperature Range="-55 to 150 degC", ComponentLink1Description="Manufacturer URL", ComponentLink1URL=http://www.diodes.com/, ComponentLink2Description=Datasheet, ComponentLink2URL=http://www.diodes.com/datasheets/ds31447.pdf, ComponentLink3Description="Package Specification", ComponentLink3URL=http://www.diodes.com/datasheets/ap02002.pdf, DatasheetVersion="Rev. 8 - 2", IDS (TA="25 degC)=-3.8 A", Mounting Technology="Surface Mount", PackageDescription="3-Pin Small Outline Transistor, Body 1.3 x 2.9 mm, Pitch 0.95 mm", PackageReference=SOT23, PackageVersion="Rev. 75", Packing="Tape and Reel", PartNumber=DMP3098L-7, PD (TA="25 degC)=1.08 W", RDS(on) (Max.) (VGS="4.5 V)=120 mOhm", RoHS=TRUE, VDS="-30 V", VGS="+/- 20 V", VGS(th) (Max.)="-2.1 V"
R1: library part CMP-03211-000885-1, "CRGP 0603 100K 1%", Ambient Temperature Range High=+70°C, Manufacturer=TE, Package=CRGP0603, Power Rating=0.25W, Resistance=100KΩ, Temperature="-55°C to +155°C", Temperature Coefficient=±100ppm/°C, Temperature Range High=+155°C, Temperature Range Low=-55°C, Tolerance=0.01, Voltage Rating=50V, Automotive=No, Category=Res, ComponentLink2Description=Datasheet, ComponentLink2URL=https://www.te.com/commerce/DocumentDelivery/DDEController?Action=srchrtrv&DocNm=9-1773463-9&DocType=DS&DocLang=English, Composition="Thick Film", Device Class L1="Passive Components", Device Class L2=Resistors, Device Class L3="Chip SMD Resistors", Digikey Description="CRGP 0603 100K 1%", Height=0.55mm, Ipc Land Pattern Name=RESC16080X45, Lead Free=Yes, Manufacturer Part Number=CRGP0603F100K, Octopart=https://octopart.com/crgp0603f100k-te+connectivity-91018719, RoHS=TRUE, Series=CRGP
R2: library part CMP-03211-006314-1, "CRGCQ0402 1KΩ 1% ±100ppm/°C 50V", Ambient Temperature Range High=+70°C, Manufacturer="TE Connectivity", Manufacturer Part Number=CRGCQ0402F1K0, Package=CRGCQ0402, Power Rating=0.0625W, Resistance=1KΩ, Temperature="-55°C to +155°C", Temperature Coefficient=±100ppm/°C, Temperature Range High=+155°C, Temperature Range Low=-55°C, Tolerance=0.01, Voltage Rating=50V, Automotive=Yes, Category=Res, ComponentLink2Description=Datasheet, ComponentLink2URL=https://www.te.com/commerce/DocumentDelivery/DDEController?Action=showdoc&DocId=Data+Sheet%7F1773204-3%7F1%7Fpdf%7FEnglish%7FENG_DS_1773204-3_1.pdf%7F4-2176347-694, Composition="Thick Film", Device Class L1="Passive Components", Device Class L2=Resistors, Device Class L3="Chip SMD Resistors", Height=0.4mm, Ipc Land Pattern Name=RESC10050X35, Lead Free=Yes, Octopart=https://octopart.com/crgcq0402f1k0-te+connectivity-91017946, RoHS=TRUE, Series=CRGCQ
R3 R4 R9: library part CMP-03412-038553-1, "RES 10kΩ 1.00% 0.2W 0603"
R5 R6: library part CMP-03211-006549-1, "CRGCQ 0603 22R 1%", Ambient Temperature Range High=+70°C, Manufacturer="TE Connectivity", Manufacturer Part Number=CRGCQ0603F22R, Package=CRGCQ0603, Power Rating=0.1W, Resistance=22Ω, Temperature="-55°C to +155°C", Temperature Coefficient=±200ppm/°C, Temperature Range High=+155°C, Temperature Range Low=-55°C, Tolerance=0.01, Voltage Rating=75V, Category=Res, ComponentLink2Description=Datasheet, ComponentLink2URL=https://www.te.com/commerce/DocumentDelivery/DDEController?Action=showdoc&DocId=Data+Sheet%7F1773204-3%7F1%7Fpdf%7FEnglish%7FENG_DS_1773204-3_1.pdf%7F4-2176339-310, Composition="Thick Film", Device Class L1="Passive Components", Device Class L2=Resistors, Device Class L3="Chip SMD Resistors", Digikey Description="CRGCQ 0603 22R 1%", Height=0.55mm, Ipc Land Pattern Name=RESC16080X45, Lead Free=Yes, Mouser Description="SMD AEC-Q200 Compliant Thick Film Chip Resistor", Octopart=https://octopart.com/crgcq0603f22r-te+connectivity-91018058, RoHS=TRUE, Series=CRGCQ
R7 R8: library part CMP-04015-008529-1, "5.1kΩ ±1% 0.063W, 1/16W Chip Resistor 0402 (1005 Metric) Moisture Resistant Thin Film"
SW1: library part CMP-05618-000109-1, "SWITCH TACTILE SPST-NO 0.02A 15V", Actuator Color=Black, Contact Current Rating=20mA, Contact Resistance=100mR, Max Operating Temperature=85°C, Max Voltage Rating (DC)=15V, Min Operating Temperature=-40°C, Operating Force=5N, Package Quantity=1, Actuator Length=0.85mm, Actuator Type=Standard, Current Rating=20mA, Depth=5.5mm, Electrical Life=200000Cycles, Illumination Type=Non-Illuminated, Lead Free="Lead Free", Length=3.5mm, Max Current Rating=20mA, Mechanical Life=200000Cycles, Mount="Surface Mount", Orientation=Straight, Packaging="Tape and Reel", Radiation Hardening=No, RoHS Compliant=Yes, Series=EVQP2, Size=3.5mm, Switch Function=Off-Mom, Switch Travel=0.7mm, Termination=J-Bend, Throw Configuration=SPST, Voltage Rating (DC)=15V
U1: library part CMP-12757-000006-1, "IC REG BUCK 3.3V 2A TSOT26", Ambient Temperature Range High=+85°C, Ambient Temperature Range Low=-40°C, Manufacturer="Diodes Inc.", Max Junction Temp=+160°C, Max Supply Voltage=32V, Min Supply Voltage=3.8V, Nominal Supply Current=22uA, Output Current=2A, Output Voltage=3.3V, Package=TSOT26, Switching Frequency=1.1MHz, Temperature="to +160°C", Automotive=No, Category=IC, ComponentLink2Description=Datasheet, ComponentLink2URL=https://www.diodes.com/assets/Datasheets/AP63200-AP63201-AP63203-AP63205.pdf, Device Class L1="Integrated Circuits (ICs)", Device Class L2="Power Management ICs", Device Class L3="Voltage Regulators - Switching", Digikey Description="IC REG BUCK 3.3V 2A TSOT26", Footprint Url=https://www.diodes.com/assets/Package-Files/TSOT26.pdf, Height=1mm, Lead Free=Yes, Manufacturer Part Number=AP63203WU-7, Mouser Description="AP63203 Series 3.3 V 2 A SMT Fixed Low IQ Synchronous Buck - TSOT-26", Number Of Outputs=1, Octopart=https://octopart.com/ap63203wu-7-diodes+inc.-98099550, Output Type=Fixed, RoHS=TRUE, Standoff Height=0.01mm, Switching Topology=Buck, Temperature Range High=+160°C
U2: library part CMP-0243-00019-3, "ARM Cortex-M4 32-bit MCU+FPU, 210 DMIPS, 1024 kB Flash, 192 kB Internal RAM, 51 I/Os, 64-pin LQFP, -40 to 85 degC, Tray", I/Os (High Current)=51, Manufacturer=STMicroelectronics, Operating Frequency(F) (Processor speed) (MHz)=168, Supply Voltage(Vcc) max (V)=3.6, Supply Voltage(Vcc) min (V)=1.8, ComponentLink1Description="Manufacturer URL", ComponentLink1URL=http://www.st.com/web/en/home.html, ComponentLink2Description=Datasheet, ComponentLink2URL=http://www.st.com/st-web-ui/static/active/en/resource/technical/document/datasheet/DM00037051.pdf, ComponentLink3Description="Package Specification", ComponentLink3URL=http://www.st.com/st-web-ui/static/active/en/resource/technical/document/datasheet/DM00037051.pdf, Core="ARM Cortex-M4", D/A Converter=2x12-bit, DatasheetVersion="Rev. 4", FLASH Size (Prog) (kB)=1024, Internal RAM Size (kB)=192, Mounting Technology="Surface Mount", PackageDescription="64-Pin Low Profile Quad Flat Package, 10 x 10 mm Body, 0.5 mm Pitch", PackageReference=LQFP64, PackageVersion="Rev. 4, 06/2013", Packing=Tray, PartNumber=STM32F405RGT6
U3: library part CMP-0326-00046-3, "ESD Solution for Super-Speed (6 Gbps) USB 3.0 Interface, 2 Channels, -40 to +85 degC, 3-pin SOT (DRT), Green (Rohs & No Sb/Br)", Breakdown Voltage(Min)(V)=9, Differential Capacitance(pF)=0.01, IO Capacitance(Typ)(pF)=0.7, IO Leakage Current(nA)=10, Manufacturer="Texas Instruments", 1394 / Firewire=TRUE, ComponentLink1Description=Datasheet, ComponentLink1URL=http://www.ti.com/general/docs/lit/getliterature.tsp?genericPartNumber=TPD2EUSB30&fileType=pdf, ComponentLink2Description="URL Link1", ComponentLink2URL=SamplesURL:http://www.ti.com/product/tpd2eusb30#samples, DatasheetVersion=SLVSAC2C, Eco-Plan="Green (RoHS & no Sb/Br)", HDMI=TRUE, IEC 61000-4-2 Air-Gap(+/- kV)=8, IEC 61000-4-2 Contact(+/- kV)=8, Mounting Technology="Surface Mount", PackageDescription="3-Flat Lead Plastic Small Outline, 1 x 1 mm (inc leads), 0.35 mm Pitch", PackageReference=DRT0003A, PackageVersion="revD, Jun-2008", PartNumber=TPD2EUSB30DRTR, Serial ATA / eSATA=TRUE, SubFamily="ESD Solution", USB Full Speed=TRUE, USB High Speed=TRUE, USB Super Speed=TRUE
U4: "Description", Manufacturer_Name="Bosch Sensortec", Copyright="Copyright (C) 2025 Ultra Librarian. All rights reserved.", Manufacturer_Part_Number=BMI270, RefDes=RefDes, Type=Type
Y1: library part CMP-27762-014646-1, "Crystal 16MHz ±10ppm (Tol) ±10ppm (Stability) 7pF FUND 70Ω 4-Pin SMD T/R"

## Free pads (board coordinates)
  round 3.2 hole 3.2 unplated: 1(160,40) 2(160,70.5) 3(129.5,70.5) 4(129.5,40)

## Nets (pads, with @x,y where several pads share a name; then routed paths per layer and width w, separated by ;. In a path a pad name is that pad's centre, name@x,y a point inside that pad or via, vN(x,y) a via of type N, cw(c..) or ccw(c..) an arc to the next point about the centre after c; other vN are vias at no path point)
3V3: C2.2 C3.2 C7.1 C8.1 C9.1 C10.1 C11.1 D4.2 FB1.2 FB2.1 L1.2 P1.5 P2.5 R3.1 R9.2 U1.1 U2.1 U2.19 U2.32 U2.48 U2.64
3V3A: C12.1 C13.1 FB1.1 U2.13
GND: C2.1 C3.1 C4.2 C5.2 C7.2 C8.2 C9.2 C10.2 C11.2 C12.2 C13.2 C14.2 C15.2 C17.2 C18.2 C19.2 C20.2 D2.2 J1.1 J1.2 J1.3 J1.4 J1.5 J1.6 J1.A1 J1.A12 J1.B1 J1.B12 P1.1 P2.1 P2.2 P3.1 P4.2 R1.2 R2.2 R4.2 R7.2 R8.2 U1.4 U2.12 U2.18 U2.63 U3.3 U4.6 U4.7 Y1.2 Y1.4
HSE_IN: C14.1 U2.5 Y1.1
HSE_OUT: C15.1 U2.6 Y1.3
NetC1_1: C1.1 U1.6
NetC1_2: C1.2 L1.1 U1.5
NetC4_1: C4.1 C5.1 L2.2 U1.2 U1.3
NetC6_1: C6.1 SW1.2 SW1.4 SW1.5
NetC17_1: C17.1 U2.31
NetC18_1: C18.1 U2.47
NetC19_1: C19.1 FB2.2 U4.8
NetC20_1: C20.1 U4.5
NetD1_1: D1.1 F1.1 Q1.2
NetD1_2: D1.2 Q1.1 R1.1
NetD2_1: D2.1 D3.1 F1.2 L2.1
NetD4_1: D4.1 R2.1
NetJ1_A5: J1.A5 R7.1
NetJ1_B5: J1.B5 R8.1
NetP1_3: P1.3 U2.49
NetP1_4: P1.4 U2.46
NetP2_3: P2.3 U2.16
NetP2_4: P2.4 U2.17
NetP3_2: P3.2 U2.40
NetP3_3: P3.3 U2.39
NetP3_4: P3.4 U2.38
NetP3_5: P3.5 U2.37
NetR3_2: R3.2 U2.20 U4.12
NetR4_1: R4.1 U2.60
NetR5_2: R5.2 U2.45
NetR6_2: R6.2 U2.44
NetU2_21: U2.21 U4.13
NetU2_22: U2.22 U4.1
NetU2_23: U2.23 U4.14
NetU2_24: U2.24 U4.4
NRST: C6.2 P1.2 R9.1 SW1.1 SW1.3 U2.7
USB_D_N: J1.A7 J1.B7 R6.1 U3.2
USB_D_P: J1.A6 J1.B6 R5.1 U3.1
USB_VBUS: D3.2 J1.A4 J1.A9 J1.B4 J1.B9
V_BAT: P4.1 Q1.3
pads on no net: J1.A8 J1.B8 U2.2 U2.3 U2.4 U2.8 U2.9 U2.10 U2.11 U2.14 U2.15 U2.25 U2.26 U2.27 U2.28 U2.29 U2.30 U2.33 U2.34 U2.35 U2.36 U2.41 U2.42 U2.43 U2.50 U2.51 U2.52 U2.53 U2.54 U2.55 U2.56 U2.57 U2.58 U2.59 U2.61 U2.62 U4.2 U4.3 U4.9 U4.10 U4.11

## Polygon pours and split planes (outlines as drawn)
no net on Int1 (GND) (split plane): 177.29,25.91 25.91,25.91 25.91,126.49 177.29,126.49
no net on Int2 (PWR) (split plane): 177.29,25.91 25.91,25.91 25.91,126.49 177.29,126.49

## Text inside footprints (layer, text, board x,y; h text height)
U4: Top 3D Body "*" at 136.367,43.34 h1.27; Top Overlay "*" at 135.25,43.34 h1.27